# EAGLE board bontor_mbed_lowpan_rev_c (EAGLE 6.3), part 1 of 2
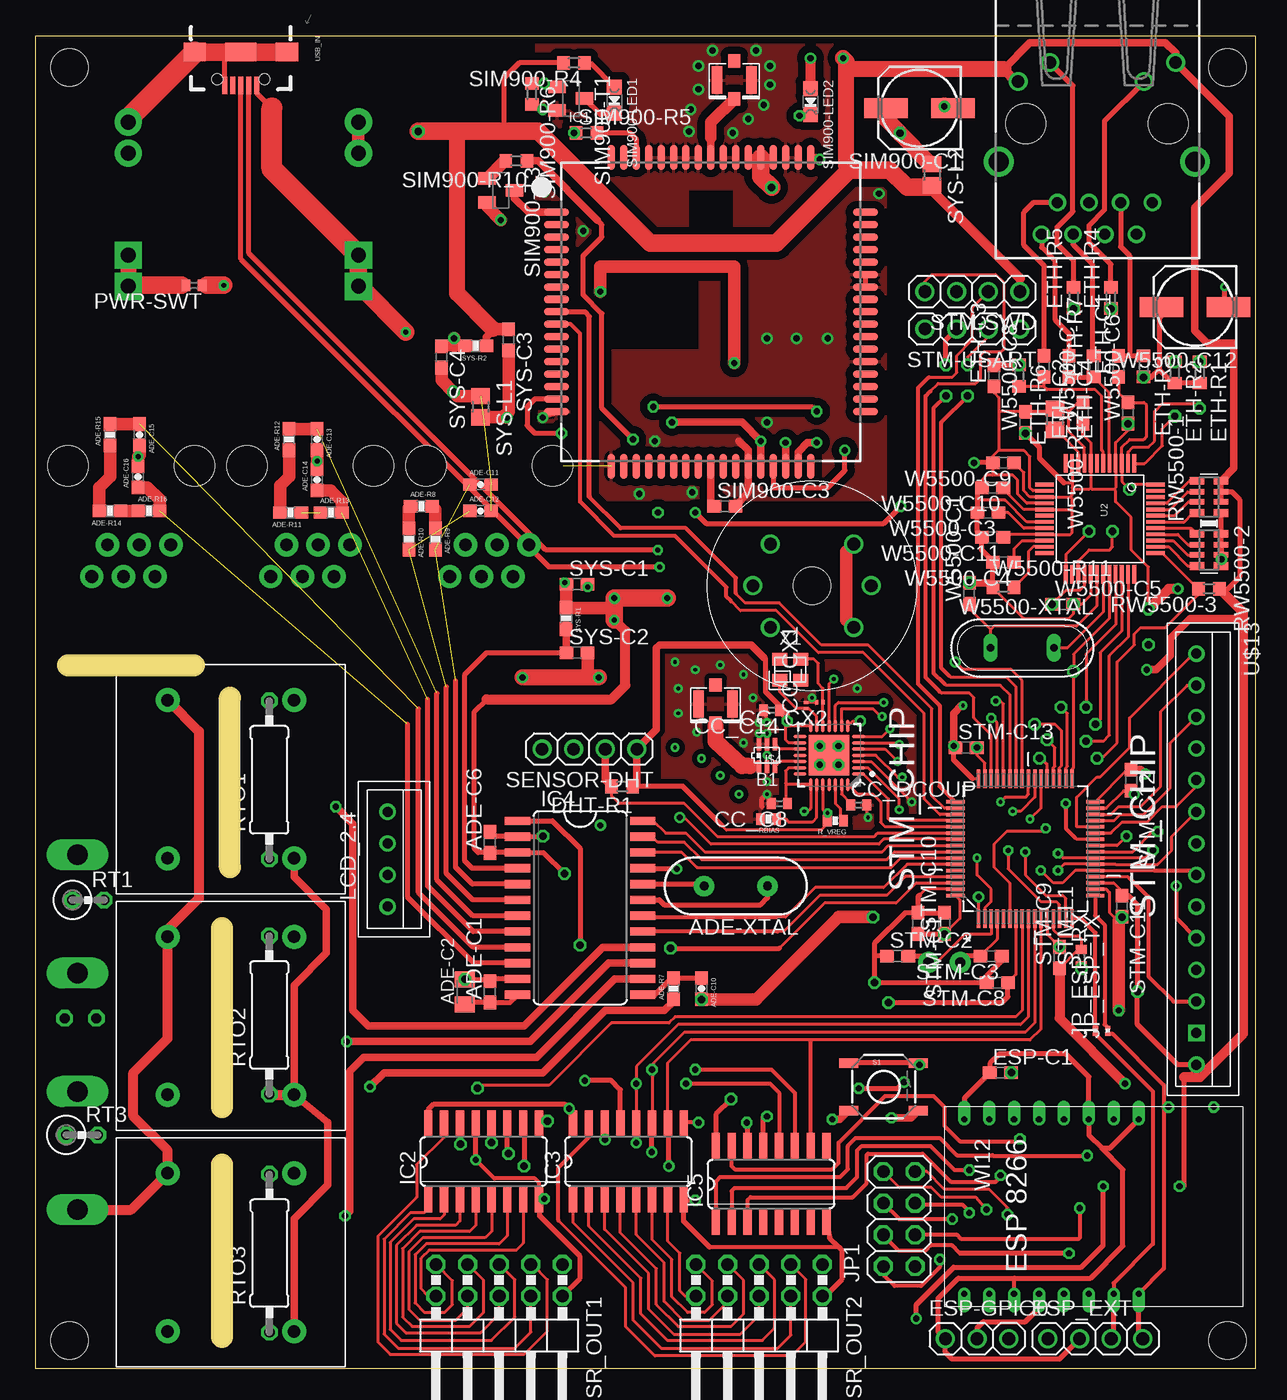
[diagram p0: board, top side]
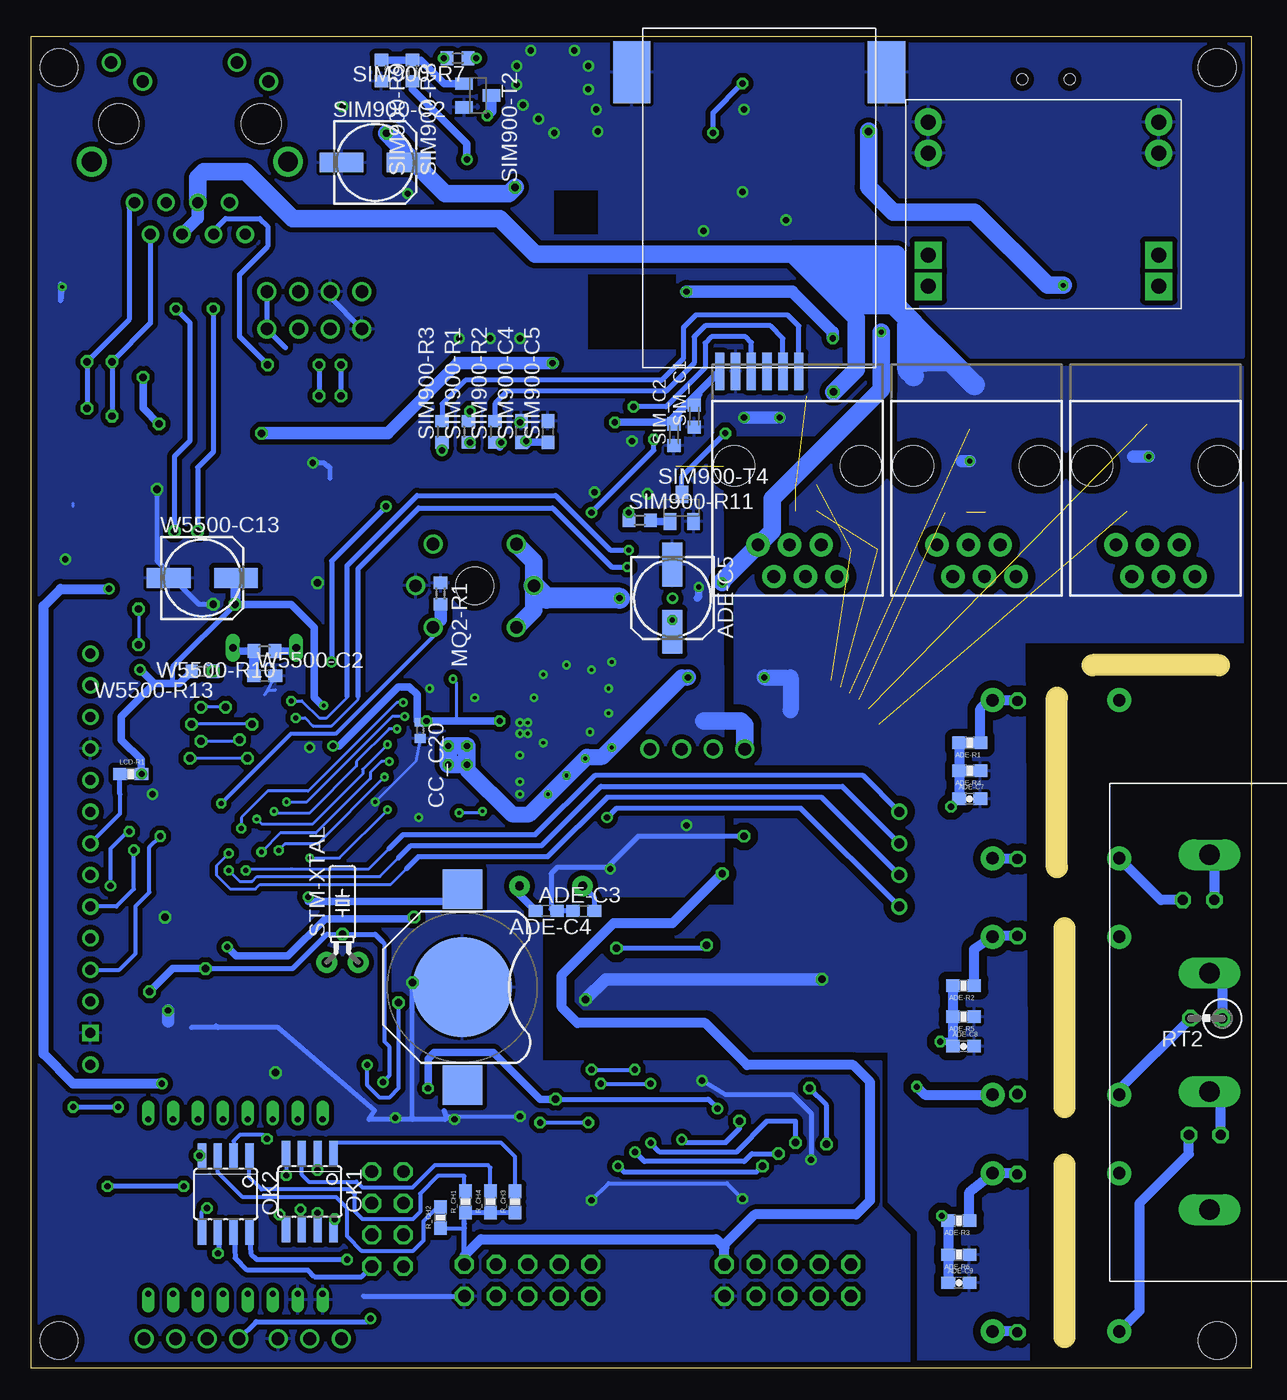
[diagram p1: board, bottom side, seen from below]

Size 98 x 107 mm. Coordinates in mm from the lower left corner, seen from the top.
Outline: 2.62,56.5 12.75,56.5
Outline: 15.62,40.25 15.62,53.88
Outline: 15,21 15,35.38
Outline: 15,2.5 15,16.38
Outline: 98,0 98,107 0,107 0,0 98,0
Copper layers (1*16): Top 0.035mm / dielectric 1.5mm / Bottom 0.035mm
Design rules "default *": minimum track width 10mil, minimum drill 10mil, track to track 0.125mm, track to pad 0.125mm, pad to pad 0.125mm, via to via 0.125mm, smd to smd 0mil, copper to edge 0.5mm, drill to drill 0.2mm, minimum pad ring 10mil, minimum via ring 8mil, stop-mask expansion 4mil, vias tented up to drill 0mil, thermal gap 10mil
Net classes: 1 power: width 0.305 mm, drill 0.6 mm, clearance 0.254 mm; 2 gnd: width 0.254 mm, drill 0.6 mm, clearance 0.254 mm
Holes 3 mm at 2.75,2.25 95.75,2.25 2.75,104.5 95.75,104.5

## Footprints (pad centres in the part's own frame; a part is rotated, then mirrored left to right if it is on the bottom)
C0603 = smd 1.1 x 1: 1 -0.85,0; 2 0.85,0
C0805K = smd 1.3 x 1.6: 1 -1,0; 2 1,0
153CLV-0605 = smd 3.5 x 1.6: + 2.7,0; - -2.7,0
0603-CAP = smd 1.1 x 1: 1 -0.85,0; 2 0.85,0
0603-RES = smd 1.1 x 1: 1 -0.85,0; 2 0.85,0
HC49US = drill 0.7 pad 1.651: 1 -2.54,0; 2 2.54,0
2450BM = smd 0.35 x 1: 1 0.65,0.9; 2 0,0.9; 3 -0.65,0.9; 4 -0.65,-0.9; 5 0,-0.9; 6 0.65,-0.9
BATTCON_12MM = smd 8 x 8: GND 0,0 | smd 3.175 x 3.175: PWR@1 -7.874,0; PWR@2 7.874,0
C0402 = smd 0.7 x 0.9: 1 -0.65,0; 2 0.65,0
C0201 = smd 0.25 x 0.35: 1 -0.25,0; 2 0.25,0
DCDCMODULE-SMALL = drill 1.2 pad 2.184: INM#1 1.8,15; INM#2 1.8,12.5; OUTM#1 20.3,15; OUTM#2 20.3,12.5 | drill 1.2 pad 2.184 square: INP#1 1.8,4.3; INP#2 1.8,1.8; OUTP#1 20.3,4.3; OUTP#2 20.3,1.8
R0603 = smd 1 x 1.1: 1 -0.85,0; 2 0.85,0
1X03 = drill 1.016: 1 -2.54,0; 2 0,0; 3 2.54,0
PINHD4 = drill 1.016: 1 -3.81,0; 2 -1.27,0; 3 1.27,0; 4 3.81,0
RJ45_PULSEJACK = drill 0.9: 1 4.445,-6.35; 2 3.175,-8.89; 3 1.905,-6.35; 4 0.635,-8.89; 5 -0.635,-6.35; 6 -1.905,-8.89; 7 -3.175,-6.35; 8 -4.445,-8.89 | drill 1: 9 6.325,4.9; 10 3.785,3.38; 11 -3.785,4.9; 12 -6.325,3.38 | drill 1.6: P$5 -7.875,-3.05; P$6 7.875,-3.05 | hole 3.2: -5.715,0; 5.715,0
SIM900_SMT = smd 2 x 0.6: P$1 -12.4,8; P$2 -12.4,7; P$3 -12.4,6; P$4 -12.4,5; P$5 -12.4,4; P$6 -12.4,3; P$7 -12.4,2; P$8 -12.4,1; P$9 -12.4,0; P$10 -12.4,-1; P$11 -12.4,-2; P$12 -12.4,-3; P$13 -12.4,-4; P$14 -12.4,-5; P$15 -12.4,-6; P$16 -12.4,-7; P$17 -12.4,-8; P$35 12.4,-8; P$36 12.4,-7; P$37 12.4,-6; P$38 12.4,-5; P$39 12.4,-4; P$40 12.4,-3; P$41 12.4,-2; P$42 12.4,-1; P$43 12.4,0; P$44 12.4,1; P$45 12.4,2; P$46 12.4,3; P$47 12.4,4; P$48 12.4,5; P$49 12.4,6; P$50 12.4,7; P$51 12.4,8 | smd 0.6 x 2: P$18 -8,-12.4; P$19 -7,-12.4; P$20 -6,-12.4; P$21 -5,-12.4; P$22 -4,-12.4; P$23 -3,-12.4; P$24 -2,-12.4; P$25 -1,-12.4; P$26 0,-12.4; P$27 1,-12.4; P$28 2,-12.4; P$29 3,-12.4; P$30 4,-12.4; P$31 5,-12.4; P$32 6,-12.4; P$33 7,-12.4; P$34 8,-12.4; P$52 8,12.4; P$53 7,12.4; P$54 6,12.4; P$55 5,12.4; P$56 4,12.4; P$57 3,12.4; P$58 2,12.4; P$59 1,12.4; P$60 0,12.4; P$61 -1,12.4; P$62 -2,12.4; P$63 -3,12.4; P$64 -4,12.4; P$65 -5,12.4; P$66 -6,12.4; P$67 -7,12.4; P$68 -8,12.4
SO16 = smd 0.66 x 2.032: 1 -4.445,-3.073; 2 -3.175,-3.073; 3 -1.905,-3.073; 4 -0.635,-3.073; 5 0.635,-3.073; 6 1.905,-3.073; 7 3.175,-3.073; 8 4.445,-3.073; 9 4.445,3.073; 10 3.175,3.073; 11 1.905,3.073; 12 0.635,3.073; 13 -0.635,3.073; 14 -1.905,3.073; 15 -3.175,3.073; 16 -4.445,3.073
SOIC24 = smd 0.66 x 2.032: 1 -6.985,-5.029; 2 -5.715,-5.029; 3 -4.445,-5.029; 4 -3.175,-5.029; 5 -1.905,-5.029; 6 -0.635,-5.029; 7 0.635,-5.029; 8 1.905,-5.029; 9 3.175,-5.029; 10 4.445,-5.029; 11 5.715,-5.029; 12 6.985,-5.029; 13 6.985,5.029; 14 5.715,5.029; 15 4.445,5.029; 16 3.175,5.029; 17 1.905,5.029; 18 0.635,5.029; 19 -0.635,5.029; 20 -1.905,5.029; 21 -3.175,5.029; 22 -4.445,5.029; 23 -5.715,5.029; 24 -6.985,5.029
U.FL = smd 2.2 x 0.85: P$1 0,1.375; P$2 0,-1.375 | smd 1.05 x 1: P$3 1.525,0; P$4 -1.525,0
RJ11-6 = drill 1.016 pad 1.88: 1 1.905,8.89; 2 3.175,6.35; 3 4.445,8.89; 4 5.715,6.35; 5 6.985,8.89; 6 8.255,6.35 | hole 3.251: 0,0; 10.16,0
2X04 = drill 1.016 octagon: 1 -3.81,-1.27; 2 -3.81,1.27; 3 -1.27,-1.27; 4 -1.27,1.27; 5 1.27,-1.27; 6 1.27,1.27; 7 3.81,-1.27; 8 3.81,1.27
R0201 = smd 0.28 x 0.43: 1 -0.255,0; 2 0.255,0
SOIC08 = smd 0.66 x 2.032: 1 -1.905,-3.073; 2 -0.635,-3.073; 3 0.635,-3.073; 4 1.905,-3.073; 5 1.905,3.073; 6 0.635,3.073; 7 -0.635,3.073; 8 -1.905,3.073
R0402 = smd 0.7 x 0.9: 1 -0.65,0; 2 0.65,0
0402-RES = smd 0.7 x 0.9: 1 -0.65,0; 2 0.65,0
0309V = drill 0.813 octagon: 1 -1.27,0; 2 1.27,0
0309/12 = drill 0.813 octagon: 1 -6.35,0; 2 6.35,0
RN8P-4R-CRA06S = smd 0.63 x 1.15: 1 -1.295,-0.975; 4 1.295,-0.975; 5 1.295,0.975; 8 -1.295,0.975 | smd 0.44 x 1.15: 2 -0.4,-0.975; 3 0.4,-0.975; 6 0.4,0.975; 7 -0.4,0.975
TACTILE-SWITCH-SMD = smd 1.524 x 0.762: 1 -2.794,1.905; 2 2.794,1.905; 3 -2.794,-1.905; 4 2.794,-1.905
MQ-3 = drill 1.016: A1 -3.35,3.35; A2 -3.35,-3.35; B1 3.35,3.35; B2 3.35,-3.35; HA -4.75,0; HB 4.75,0 | hole 3: 0,0
CHIPLED_0805_NOOUTLINE = smd 1.2 x 1.2: A 0,-1.05; C 0,1.05
SOT23-BEC = smd 1 x 1.4: B -0.95,-1.1; C 0,1.1; E 0.95,-1.1
C0603K = smd 1.05 x 1.08: 1 -0.875,0; 2 0.875,0
2X05/90 = drill 1.016 octagon: 1 -5.08,-6.35; 2 -5.08,-3.81; 3 -2.54,-6.35; 4 -2.54,-3.81; 5 0,-6.35; 6 0,-3.81; 7 2.54,-6.35; 8 2.54,-3.81; 9 5.08,-6.35; 10 5.08,-3.81
0402 = smd 0.7 x 0.9: 1 -0.65,0; 2 0.65,0
TC26H = drill 0.813 pad 1.676: 1 -1.27,0; 2 1.27,0
QFP50P1200X1200X160-64N = smd 1.473 x 0.279: 1 -5.613,3.759; 2 -5.613,3.251; 3 -5.613,2.743; 4 -5.613,2.261; 5 -5.613,1.753; 6 -5.613,1.245; 7 -5.613,0.762; 8 -5.613,0.254; 9 -5.613,-0.254; 10 -5.613,-0.762; 11 -5.613,-1.245; 12 -5.613,-1.753; 13 -5.613,-2.261; 14 -5.613,-2.743; 15 -5.613,-3.251; 16 -5.613,-3.759; 33 5.613,-3.759; 34 5.613,-3.251; 35 5.613,-2.743; 36 5.613,-2.261; 37 5.613,-1.753; 38 5.613,-1.245; 39 5.613,-0.762; 40 5.613,-0.254; 41 5.613,0.254; 42 5.613,0.762; 43 5.613,1.245; 44 5.613,1.753; 45 5.613,2.261; 46 5.613,2.743; 47 5.613,3.251; 48 5.613,3.759 | smd 0.279 x 1.473: 17 -3.759,-5.613; 18 -3.251,-5.613; 19 -2.743,-5.613; 20 -2.261,-5.613; 21 -1.753,-5.613; 22 -1.245,-5.613; 23 -0.762,-5.613; 24 -0.254,-5.613; 25 0.254,-5.613; 26 0.762,-5.613; 27 1.245,-5.613; 28 1.753,-5.613; 29 2.261,-5.613; 30 2.743,-5.613; 31 3.251,-5.613; 32 3.759,-5.613; 49 3.759,5.613; 50 3.251,5.613; 51 2.743,5.613; 52 2.261,5.613; 53 1.753,5.613; 54 1.245,5.613; 55 0.762,5.613; 56 0.254,5.613; 57 -0.254,5.613; 58 -0.762,5.613; 59 -1.245,5.613; 60 -1.753,5.613; 61 -2.261,5.613; 62 -2.743,5.613; 63 -3.251,5.613; 64 -3.759,5.613
FB805 = smd 1.3 x 1.5: 1 -0.85,0; 2 0.85,0
W5500 = smd 1.5 x 0.3: 1 -4.45,2.75; 2 -4.45,2.25; 3 -4.45,1.75; 4 -4.45,1.25; 5 -4.45,0.75; 6 -4.45,0.25; 7 -4.45,-0.25; 8 -4.45,-0.75; 9 -4.45,-1.25; 10 -4.45,-1.75; 11 -4.45,-2.25; 12 -4.45,-2.75; 25 4.45,-2.75; 26 4.45,-2.25; 27 4.45,-1.75; 28 4.45,-1.25; 29 4.45,-0.75; 30 4.45,-0.25; 31 4.45,0.25; 32 4.45,0.75; 33 4.45,1.25; 34 4.45,1.75; 35 4.45,2.25; 36 4.45,2.75 | smd 0.3 x 1.5: 13 -2.75,-4.45; 14 -2.25,-4.45; 15 -1.75,-4.45; 16 -1.25,-4.45; 17 -0.75,-4.45; 18 -0.25,-4.45; 19 0.25,-4.45; 20 0.75,-4.45; 21 1.25,-4.45; 22 1.75,-4.45; 23 2.25,-4.45; 24 2.75,-4.45; 37 2.75,4.45; 38 2.25,4.45; 39 1.75,4.45; 40 1.25,4.45; 41 0.75,4.45; 42 0.25,4.45; 43 -0.25,4.45; 44 -0.75,4.45; 45 -1.25,4.45; 46 -1.75,4.45; 47 -2.25,4.45; 48 -2.75,4.45
QFN50P500X500X100-29N = smd 1.05 x 0.3: 1 -2.35,1.5; 2 -2.35,1; 3 -2.35,0.5; 4 -2.35,0; 5 -2.35,-0.5; 6 -2.35,-1; 7 -2.35,-1.5; 15 2.35,-1.5; 16 2.35,-1; 17 2.35,-0.5; 18 2.35,0; 19 2.35,0.5; 20 2.35,1; 21 2.35,1.5 | smd 0.3 x 1.05: 8 -1.5,-2.35; 9 -1,-2.35; 10 -0.5,-2.35; 11 0,-2.35; 12 0.5,-2.35; 13 1,-2.35; 14 1.5,-2.35; 22 1.5,2.35; 23 1,2.35; 24 0.5,2.35; 25 0,2.35; 26 -0.5,2.35; 27 -1,2.35; 28 -1.5,2.35 | smd 3.25 x 3.25: 29 0,0
WI12 = drill 0.5 pad 0.813 offset: ADC 10.4,1; CH_PD 12.4,1; GND 22.4,15; GPIO00 16.4,15; GPIO02 18.4,15; GPIO04 12.4,15; GPIO05 14.4,15; GPIO12 18.4,1; GPIO13 20.4,1; GPIO14 16.4,1; GPIO15 20.4,15; GPIO16 14.4,1; REST 8.4,1; RXD 10.4,15; TXD 8.4,15; VCC 22.4,1
SIMHOLDER-PUSHPUSH = smd 3 x 5: SHIELD_GND$1 -0.89,23.75; SHIELD_GND$2 19.56,23.75 | smd 0.75 x 3: SIM_CLK 11.25,-0.28; SIM_GND 7.44,-0.28; SIM_IO 12.52,-0.28; SIM_RST 8.71,-0.28; SIM_VDD 6.17,-0.28; VPP 9.98,-0.28
TV16 = drill 1 pad 1.93: IA 4.12,2.85; IB 4.12,15.55; OA 14.28,15.55; OB 14.28,2.85
TERMINAL-TWO-WAY = drill 1.65 long: PIN$1 0,14.25; PIN$2 0,4.75; PIN$3 0,-4.75; PIN$4 0,-14.25
LCD_TOUCH_2-4 = drill 0.8: LCD_CS 11.4,64.99; LCD_D/C 6.32,64.99; LCD_MISO -3.84,64.99; LCD_MOSI 3.78,64.99; LCD_RESET 8.86,64.99; LCD_SCK 1.24,64.99; LCD_VCC 16.48,64.99; LED -1.3,64.99; SD_CS 3.78,0.035; SD_MISO -1.3,0.035; SD_MOSI 1.24,0.035; SD_SCK -3.84,0.035; T_CLK -6.38,64.99; T_CS -8.92,64.99; T_DIN -11.46,64.99; T_DO -14,64.99; T_IRQ -16.54,64.99 | drill 0.8 square: LCD_GND 13.94,64.99
USB-B-MICRO-SMD_V03 = smd 1.4 x 0.4: D+1 2.7,0; D-1 2.7,0.65; GND1 2.7,-1.3; ID1 2.7,-0.65; VBUS1 2.7,1.3 | smd 1.5 x 1.8: SHIELD1 0,3.7; SHIELD2 0,-3.7 | smd 1.5 x 2.5: SHIELD3 0,0 | hole 0.85: 2.2,1.9; 2.2,-1.9
R0805 = smd 1.3 x 1.5: 1 -0.85,0; 2 0.85,0
QS = drill 0.61 long: 1 -2.54,0; 2 2.54,0
NX2520SA = smd 1.2 x 1: 1 -0.85,-0.85; 2 0.85,-0.85; 3 0.85,0.85; 4 -0.85,0.85

## Placement (x,y rotation side)
ADE-C1  0.1uF  [C0603]  36.5,30.25 90 top
ADE-C2  10uF  [C0805K]  34.5,30.25 90 top
ADE-C3  22pF  [C0603]  56.62,36.75 0 bottom
ADE-C4  22pF  [C0603]  53.62,36.75 180 bottom
ADE-C5  10uF  [153CLV-0605]  46.5,61.88 270 bottom
ADE-C6  100nF  [C0603]  36.5,42.25 90 top
ADE-C7  33nF  [0603-CAP]  22.62,45.75 0 bottom
ADE-C8  33nF  [0603-CAP]  23.12,25.88 0 bottom
ADE-C9  33nF  [0603-CAP]  23.5,6.88 0 bottom
ADE-C10  33nF  [0603-CAP]  53.5,30.5 270 top
ADE-C11  33nF  [0603-CAP]  35.75,71 0 top
ADE-C12  33nF  [0603-CAP]  35.75,68.88 0 top
ADE-C13  33nF  [0603-CAP]  22.62,74.62 270 top
ADE-C14  33nF  [0603-CAP]  22.62,71.38 90 top
ADE-C15  33nF  [0603-CAP]  8.38,75 270 top
ADE-C16  33nF  [0603-CAP]  8.25,71.62 90 top
ADE-R1  81K  [0603-RES]  22.62,50.25 180 bottom
ADE-R2  81K  [0603-RES]  23.12,30.75 180 bottom
ADE-R3  81K  [0603-RES]  23.5,11.88 180 bottom
ADE-R4  1K  [0603-RES]  22.62,48 180 bottom
ADE-R5  1K  [0603-RES]  23.12,28.25 180 bottom
ADE-R6  1K  [0603-RES]  23.5,9.12 180 bottom
ADE-R7  1K  [0603-RES]  51.25,30.5 90 top
ADE-R8  33R  [0603-RES]  31,69.25 0 top
ADE-R9  1K  [0603-RES]  32.12,66.62 270 top
ADE-R10  1K  [0603-RES]  30,66.62 270 top
ADE-R11  33R  [0603-RES]  20.5,68.75 180 top
ADE-R12  1K  [0603-RES]  20.38,74.62 90 top
ADE-R13  1K  [0603-RES]  23.75,68.75 0 top
ADE-R14  33R  [0603-RES]  6,68.88 180 top
ADE-R15  1K  [0603-RES]  6,75 90 top
ADE-R16  1K  [0603-RES]  9.12,68.88 0 top
ADE-XTAL  10MHz  [HC49US]  56.25,38.75 180 top
B1  2450BM15A0002  [2450BM]  58.75,49.25 180 top
BAT1  [BATTCON_12MM]  63.38,30.62 270 bottom
CC_C8  100nF  [C0402]  59.75,45.38 180 top
CC_C14  100nF  [C0402]  59.12,52.88 180 top
CC_C20  100nF  [C0402]  66.75,51.25 270 bottom
CC_CX1  27p  [C0201]  61.88,53.25 90 top
CC_CX2  27p  [C0201]  63,53.5 180 top
CC_DCOUP  100nF  [C0402]  66.12,45.25 0 top
DCDC-3.5V  DCDCMODULE_SMALL  [DCDCMODULE-SMALL]  27.75,85.12 0 bottom
DHT-R1  10k  [R0603]  47.12,46.75 180 top
ESP-C1  100nF  [C0603]  77.5,23.75 0 top
ESP-GPIO0  [1X03]  75.62,2.38 0 top
ESP_EXT  PINHD4  [PINHD4]  85.12,2.38 0 top
ETH-C1  22nF  [C0603]  87,80.5 90 top
ETH-C2  6.8nF  [C0603]  81,80.5 270 top
ETH-C3  10nF  [C0603]  77,79.75 90 top
ETH-C4  6.8nF  [C0603]  83,80.5 270 top
ETH-R1  49R9  [R0603]  93.5,80 270 top
ETH-R2  49R9  [R0603]  91.5,80 270 top
ETH-R3  10R  [R0603]  89,80.5 270 top
ETH-R4  330  [R0603]  86.38,86 90 top
ETH-R5  330  [R0603]  83.38,86 90 top
ETH-R6  49R9  [R0603]  79,79.75 270 top
ETH-R7  49R9  [R0603]  85,80.5 90 top
ETHERNET  [RJ45_PULSEJACK]  85.25,100 0 top
IC1  SIM900  [SIM900_SMT]  54.25,84.88 0 top
IC2  74HC595D  [SO16]  36,16.62 0 top
IC3  74HC595D  [SO16]  47.62,16.62 0 top
IC4  ADE7758RW  [SOIC24]  43.75,37 270 top
IC5  74HC595D  [SO16]  59.09,14.81 0 top
J1  U.FL  [U.FL]  54.62,53.38 270 top
J2  RJ11-6PTH  [RJ11-6]  31.38,72.5 180 bottom
J3  RJ11-6PTH  [RJ11-6]  17,72.5 180 bottom
J4  RJ11-6PTH  [RJ11-6]  2.62,72.5 180 bottom
JP1  [2X04]  69.38,12 90 top
JP_ESP_RX  0  [R0201]  85.12,27.12 90 top
JP_ESP_TX  0  [R0201]  86.12,27.12 90 top
LCD-R1  680R  [0603-RES]  90,47.75 0 bottom
MQ2-R1  10k  [R0603]  65.12,62.25 270 bottom
OK1  ILD205  [SOIC08]  75.62,14.2 180 bottom
OK2  ILD205  [SOIC08]  82.38,14 180 bottom
PWR-SWT  [R0402]  12.75,87 180 top
R_CH1  270  [0603-RES]  63.12,13.38 90 bottom
R_CH2  270  [0603-RES]  65.14,12.11 90 bottom
R_CH3  270  [0603-RES]  59.12,13.38 90 bottom
R_CH4  270  [0603-RES]  61.12,13.38 90 bottom
R_VREG  10K  [0402-RES]  64.25,44 180 top
RBIAS  56k  [0402-RES]  58.88,44.12 180 top
RT1  [0309V]  4.25,37.62 0 top
RT2  [0309V]  3.62,28.12 180 bottom
RT3  [0309V]  3.75,18.75 0 top
RTO1  [0309/12]  18.79,47.27 90 top
RTO2  [0309/12]  18.79,28.39 90 top
RTO3  [0309/12]  18.8,9.25 90 top
RW5500-1  10k  [RN8P-4R-CRA06S]  94.25,70 90 top
RW5500-2  10k  [RN8P-4R-CRA06S]  94.25,65.75 270 top
RW5500-3  10k  [R0603]  94.25,62.62 180 top
S1  [TACTILE-SWITCH-SMD]  68.12,22.62 0 top
SENSOR-DHT  PINHD4  [PINHD4]  44.5,49.75 180 top
SENSOR-MQ2  METHANE_SENSOR  [MQ-3]  62.38,62.88 0 top
SIM900-C1  100uF  [153CLV-0605]  71,101.25 180 top
SIM900-C2  100uF  [153CLV-0605]  70.38,96.88 0 bottom
SIM900-C3  4u7  [C0603]  55.38,69.25 0 top
SIM900-C4  100nF  [C0603]  58.62,75.25 90 bottom
SIM900-C5  22pF  [C0603]  56.5,75.25 90 bottom
SIM900-LED1  [CHIPLED_0805_NOOUTLINE]  46.5,101.88 180 top
SIM900-LED2  [CHIPLED_0805_NOOUTLINE]  62.25,101.75 180 top
SIM900-R1  22R  [R0603]  62.88,75.25 90 bottom
SIM900-R2  22R  [R0603]  60.75,75.25 90 bottom
SIM900-R3  22R  [R0603]  65,75.25 90 bottom
SIM900-R4  680R  [R0603]  43.25,104.88 180 top
SIM900-R5  1K  [R0603]  44.25,99.25 0 top
SIM900-R6  10K  [R0603]  39.88,102.38 270 top
SIM900-R7  680R  [R0603]  63.75,105.25 180 bottom
SIM900-R8  1K  [R0603]  67.38,104.25 270 bottom
SIM900-R9  10K  [R0603]  69.88,104.25 270 bottom
SIM900-R10  120R  [R0603]  38.62,97 180 top
SIM900-R11  120R  [R0603]  49.12,68.12 0 bottom
SIM900-T1  [SOT23-BEC]  43,102 270 top
SIM900-T2  [SOT23-BEC]  62.12,102.25 270 bottom
SIM900-T3  [SOT23-BEC]  37.38,94.62 270 top
SIM900-T4  [SOT23-BEC]  45.75,69.12 0 bottom
SIM_C1  100nF  [C0603K]  44.75,76.5 90 bottom
SIM_C2  22pF  [C0603K]  46.38,75 90 bottom
SR_OUT1  [2X05/90]  37.25,2 180 top
SR_OUT2  [2X05/90]  58.12,2 180 top
STM-C1  1uF  [C0603]  70.88,35.75 270 top
STM-C2  4.3pF  [C0603]  69.25,33.12 0 top
STM-C3  4.3pF  [C0603]  76.75,33.12 180 top
STM-C8  100nF  [C0603]  77.25,31 180 top
STM-C9  100nF  [C0603]  82.25,33 90 top
STM-C10  100nF  [C0603]  73,35.75 90 top
STM-C11  100nF  [C0603]  87.25,37.12 270 top
STM-C12  100nF  [C0603]  88,47.25 270 top
STM-C13  100nF  [C0603]  74.75,49.88 0 top
STM-L1  BLM15HB121SN1  [0402]  84,33 90 top
STM-SWD  PINHD4  [PINHD4]  75.25,86.5 180 top
STM-USART  PINHD4  [PINHD4]  75.25,83.5 180 top
STM-XTAL  32.768kHz  [TC26H]  73,32.62 0 bottom
STM_CHIP  STM32F103RBT6  [QFP50P1200X1200X160-64N]  79.5,41.75 90 top
SYS-C1  0.1uF  [C0603]  43.5,63 0 top
SYS-C2  0.1uF  [C0603]  43.5,57.5 0 top
SYS-C3  0.1uF  [C0603]  38,82.62 270 top
SYS-C4  0.1uF  [C0603]  32.62,81.25 270 top
SYS-L1  150Mhz  [FB805]  35.75,77.25 270 top
SYS-L2  150Mhz  [FB805]  72,95.88 270 top
SYS-R1  10R  [0603-RES]  42.62,60.25 270 top
SYS-R2  10R  [0603-RES]  35.38,82.12 180 top
U2  W5500  [W5500]  85.5,68.25 270 top
U$4  CC2520  [QFN50P500X500X100-29N]  63.75,49.25 180 top
U$5  ESP8266WI12  [WI12]  97,21 180 top
U$7  U.FL  [U.FL]  56.12,103.5 270 top
U$8  SIM_HOLDER  [SIMHOLDER-PUSHPUSH]  48.88,80.38 0 bottom
U$9  TRANSFORMER  [TV16]  6.5,38.12 0 top
U$10  TRANSFORMER  [TV16]  6.5,19.12 0 top
U$11  TRANSFORMER  [TV16]  6.5,0.12 0 top
U$12  TERMINAL_BLOCK_TW  [TERMINAL-TWO-WAY]  3.38,27 0 bottom
U$13  LCD_2.4  [LCD_TOUCH_2-4]  28.25,40.88 270 top
USB_IN  USB_MICROB  [USB-B-MICRO-SMD_V03]  16.5,105.75 270 top
W5500-C1  18pF  [C0603]  75,62.25 90 top
W5500-C2  18pF  [C0603]  79.25,55.62 0 bottom
W5500-C3  4.7uF  [C0603]  76.5,68.75 180 top
W5500-C4  10nF  [C0603]  77.75,64.75 180 top
W5500-C5  100nF  [C0603]  82.5,61.38 0 top
W5500-C6  100nF  [C0603]  87.75,76.75 90 top
W5500-C7  100nF  [C0603]  84.12,76.75 90 top
W5500-C8  100nF  [C0603]  79.5,76 90 top
W5500-C9  100nF  [C0603]  77.75,72.75 180 top
W5500-C10  100nF  [C0603]  76.88,70.75 180 top
W5500-C11  100nF  [C0603]  76.88,66.75 180 top
W5500-C12  10uF/16V  [153CLV-0605]  93.12,85.25 180 top
W5500-C13  10uF/16V  [153CLV-0605]  84.25,63.5 0 bottom
W5500-R10  1M  [R0603]  79.25,57.62 180 bottom
W5500-R11  10k  [R0603]  77.75,62.75 0 top
W5500-R12  12K4  [R0805]  81.88,76.25 270 top
W5500-R13  10k  [R0603]  84.25,56 180 bottom
W5500-XTAL  25MHz  [QS]  79.25,57.88 0 top
X1  NX2520SA  [NX2520SA]  60.62,56.12 0 top

## Library data of the parts
ADE-C1-ADE-C6 CC_C8 CC_C14 CC_C20 CC_CX1 CC_CX2 CC_DCOUP ESP-C1 ETH-C1-ETH-C4 JP_ESP_RX JP_ESP_TX PWR-SWT RT1-RT3 RTO1-RTO3 RW5500-3 SIM900-C1-SIM900-C5 SIM900-R1-SIM900-R9 SIM_C1 SIM_C2 STM-C1-STM-C3 STM-C8-STM-C13 SYS-C1-SYS-C4 W5500-C1-W5500-C13 = rcl
ADE-C7-ADE-C16 ADE-R1-ADE-R16 LCD-R1 R_CH1-R_CH4 R_VREG RBIAS SYS-R1 SYS-R2 = SparkFun-Passives
ADE-XTAL STM-XTAL = SparkFun-FreqCtrl
B1 = rpi-cc2520; DIGIKEY: 712-1536-1-ND
BAT1 = SparkFun-Electromechanical; PROD_ID: BATT-08044
DCDC-3.5V U$8-U$13 = bontor
DHT-R1 ETH-R1-ETH-R7 MQ2-R1 SIM900-R10 SIM900-R11 W5500-R10-W5500-R13 = resistor
ESP-GPIO0 = adafruit
ESP_EXT SENSOR-DHT STM-SWD STM-USART = TFT_LCD_2.2
ETHERNET IC1 SIM900-LED1 SIM900-LED2 = microbuilder
IC2 IC3 IC5 = 74xx-eu
IC4 = ade7758
J1 = SparkFun-Connectors; PROD_ID: CONN-09193
J2-J4 U$7 = SparkFun
JP1 SR_OUT1 SR_OUT2 = pinhead
OK1 OK2 = optocoupler; MF: VISHAY/TELEFUNKEN; MPN: ILD205T; OC_FARNELL: 1469512; OC_NEWARK: 20H8678
RW5500-1 RW5500-2 SYS-L1 SYS-L2 = dp_devices
S1 = SparkFun-Electromechanical
SENSOR-MQ2 = SparkFun-Sensors
SIM900-T1 SIM900-T2 = transistor
SIM900-T3 SIM900-T4 = transistor-neu-to92
STM-L1 = inductors
STM_CHIP = ST Microelctronics_By_element14_Batch_1; MPN: STM32L152RBT6; OC_FARNELL: 2060946; OC_NEWARK: 65T3806; PACKAGE: QTP-64; SUPPLIER: STMICROELECTRONICS
U2 = W5500
U$4 = chipcon-ti-v2
U$5 = esp8266
USB_IN = SparkFun-Connectors; PROD_ID: CONN-11752
W5500-XTAL = special
X1 = bbb-cc2520; DIGIKEY: 644-1065-1-ND

## Nets
+5V [power]: ADE-C5.+ ADE-C6.1 DCDC-3.5V.INP#1 DCDC-3.5V.INP#2 IC4.3 R_CH1.1 R_CH2.1 R_CH3.1 R_CH4.1 SENSOR-MQ2.A1 SENSOR-MQ2.A2 SENSOR-MQ2.HA SR_OUT1.1 SR_OUT2.1 SYS-C1.1 SYS-R1.1 USB_IN.VBUS1
ACTLED: ETH-R4.1 U2.27
ADE_APCF: IC4.1 STM_CHIP.62
ADE_IRQ: IC4.18 STM_CHIP.59
ADE_MISO: IC4.24 STM_CHIP.56
ADE_MOSI: IC4.22 STM_CHIP.58
ADE_SCK: IC4.23 STM_CHIP.57
ADE_VARCF: IC4.17 STM_CHIP.61
AGND: ADE-C1.2 ADE-C2.2 ADE-C7.2 ADE-C8.2 ADE-C9.2 ADE-C10.2 ADE-C11.2 ADE-C12.2 ADE-C13.2 ADE-C14.2 ADE-C15.2 ADE-C16.2 ADE-R4.1 ADE-R5.1 ADE-R6.1 ETHERNET.4 ETHERNET.5 IC4.11 STM-C9.2 STM_CHIP.12 SYS-C2.2 SYS-C4.2 SYS-L1.1 U$4.29
AVDD: IC4.4 SYS-C2.1 SYS-R1.2
CC_GPIO0: STM_CHIP.6 U$4.10
CC_GPIO1: STM_CHIP.40 U$4.9
CC_GPIO2: STM_CHIP.39 U$4.7
CC_GPIO3: STM_CHIP.38 U$4.6
CC_GPIO4: STM_CHIP.15 U$4.5
CC_GPIO5: STM_CHIP.14 U$4.4
CC_MISO: STM_CHIP.52 U$4.1
CC_MOSI: STM_CHIP.2 U$4.2
CC_RESET: U$4.25
CC_SCK: STM_CHIP.53 U$4.28
CH1_A: JP1.2 OK2.8
CH1_B: JP1.1 OK2.7
CH1_IN: IC5.15 OK2.2
CH2_A: JP1.4 OK2.6
CH2_B: JP1.3 OK2.5
CH2_IN: IC5.1 OK2.4
CH3_A: JP1.6 OK1.8
CH3_B: JP1.5 OK1.7
CH3_IN: IC5.2 OK1.2
CH4_A: JP1.8 OK1.6
CH4_B: JP1.7 OK1.5
CH4_IN: IC5.3 OK1.4
DC_VOUT: DCDC-3.5V.OUTP#1 DCDC-3.5V.OUTP#2 PWR-SWT.2
DGND: ADE-C3.2 ADE-C4.2 ADE-C5.- ADE-C6.2 B1.2 B1.5 B1.6 BAT1.GND CC_C8.2 CC_C14.2 CC_C20.2 CC_CX1.2 CC_CX2.2 CC_DCOUP.2 DCDC-3.5V.INM#1 DCDC-3.5V.INM#2 DCDC-3.5V.OUTM#1 DCDC-3.5V.OUTM#2 ESP-C1.2 ESP-GPIO0.3 ETH-C1.1 ETH-C3.1 IC1.P$17 IC1.P$18 IC1.P$29 IC1.P$39 IC1.P$45 IC1.P$46 IC1.P$53 IC1.P$54 IC1.P$58 IC1.P$59 IC1.P$61 IC1.P$62 IC1.P$63 IC1.P$64 IC1.P$65 IC2.8 IC2.13 IC3.8 IC3.13 IC4.2 IC4.21 IC5.8 IC5.13 J1.P$1 J1.P$2 MQ2-R1.1 RBIAS.2 RW5500-1.1 RW5500-2.5 RW5500-2.6 RW5500-2.7 RW5500-2.8 S1.3 S1.4 SENSOR-DHT.4 SENSOR-MQ2.HB SIM900-C1.- SIM900-C2.- SIM900-C3.2 SIM900-C4.2 SIM900-C5.2 SIM900-R6.2 SIM900-R9.2 SIM900-T1.E SIM900-T2.E SIM900-T3.E SIM900-T4.E SIM_C1.1 SIM_C2.1 SR_OUT1.2 SR_OUT2.2 STM-C1.1 STM-C2.1 STM-C3.1 STM-C8.2 STM-C10.2 STM-C11.2 STM-C12.2 STM-C13.2 STM-SWD.3 STM-USART.4 STM_CHIP.18 STM_CHIP.31 STM_CHIP.47 STM_CHIP.63 SYS-C1.2 SYS-C3.2 SYS-L1.2 U2.3 U2.9 U2.14 U2.16 U2.19 U2.29 U2.48 U$4.3 U$5.GND U$5.GPIO15 U$7.P$1 U$7.P$2 U$8.SHIELD_GND$1 U$8.SHIELD_GND$2 U$8.SIM_GND U$13.LCD_GND U$13.T_CS USB_IN.GND1 USB_IN.SHIELD1 USB_IN.SHIELD2 USB_IN.SHIELD3 W5500-C1.2 W5500-C2.2 W5500-C3.2 W5500-C4.2 W5500-C5.2 W5500-C6.2 W5500-C7.2 W5500-C8.2 W5500-C9.2 W5500-C10.2 W5500-C11.2 W5500-C12.- W5500-C13.- W5500-R11.1 W5500-R12.1
DHT_DATA: DHT-R1.2 SENSOR-DHT.2 STM_CHIP.54
ESP_GPIO0: ESP-GPIO0.2 U$5.GPIO00
ESP_RX: ESP_EXT.3 JP_ESP_RX.1 U$5.RXD
ESP_TX: ESP_EXT.4 JP_ESP_TX.1 U$5.TXD
ETH_CS: STM_CHIP.33 U2.32 W5500-R13.1
ETH_MISO: STM_CHIP.35 U2.34
ETH_MOSI: STM_CHIP.36 U2.35
ETH_RSTN: RW5500-3.2 STM_CHIP.37 U2.37
ETH_SCK: STM_CHIP.34 U2.33
GPIO11: IC1.P$67
GPIO12: IC1.P$68
IBN: ADE-R11.1 ADE-R13.1
ICN: ADE-R14.1 ADE-R16.1
LCD_CS: STM_CHIP.20 U$13.LCD_CS
LCD_D/C: STM_CHIP.24 U$13.LCD_D/C
LCD_LED: LCD-R1.1 U$13.LED
LCD_MISO: STM_CHIP.22 U$13.LCD_MISO U$13.SD_MISO
LCD_MOSI: STM_CHIP.23 U$13.LCD_MOSI U$13.SD_MOSI
LCD_RESET: STM_CHIP.25 U$13.LCD_RESET
LCD_SCK: STM_CHIP.21 U$13.LCD_SCK U$13.SD_SCK
LINKLED: ETH-R5.1 U2.25
MQ2_DATA: MQ2-R1.2 SENSOR-MQ2.B1 SENSOR-MQ2.B2 STM_CHIP.26
N: U$9.IB U$10.IB U$11.IB U$12.PIN$4
N$1: STM-C2.2 STM-XTAL.2 STM_CHIP.3
N$2: STM-C3.2 STM-XTAL.1 STM_CHIP.4
N$3: IC1.P$31 SIM900-R3.1
N$5: OK2.1 R_CH1.2
N$6: OK2.3 R_CH2.2
N$7: OK1.1 R_CH3.2
N$8: IC1.P$32 SIM900-R2.1
N$9: R_VREG.1 U$4.26
N$10: ADE-C9.1 ADE-R3.2 ADE-R6.2 IC4.14
N$11: ETH-R4.2 ETHERNET.10
N$12: ETH-R5.2 ETHERNET.11
N$13: IC1.P$33 SIM900-R1.1
N$14: IC1.P$26 SIM900-C3.1
N$15: IC1.P$60 U$7.P$3
N$16: SIM900-LED1.A SIM900-R4.1
N$17: SIM900-LED1.C SIM900-T1.C
N$18: SIM900-R5.1 SIM900-R6.1 SIM900-T1.B
N$19: SIM900-LED2.A SIM900-R7.1
N$20: SIM900-LED2.C SIM900-T2.C
N$21: SIM900-R8.1 SIM900-R9.1 SIM900-T2.B
N$22: ETH-C2.1 ETHERNET.7
N$23: ETH-C1.2 ETH-R3.1 ETHERNET.3
N$24: ADE-C15.1 ADE-R15.2 IC4.9
N$25: ADE-R11.2 ADE-R12.1
N$26: ETH-C4.1 ETHERNET.8
N$27: ADE-C11.1 ADE-R9.2 IC4.5
N$28: ADE-C12.1 ADE-R10.2 IC4.6
N$29: ETH-C3.2 ETH-R6.1 ETH-R7.2 ETHERNET.6
N$30: ADE-C14.1 ADE-R13.2 IC4.8
N$31: ADE-C13.1 ADE-R12.2 IC4.7
N$32: ADE-C1.1 ADE-C2.1 IC4.12
N$33: ADE-C3.1 ADE-XTAL.1 IC4.19
N$34: ADE-C4.1 ADE-XTAL.2 IC4.20
N$35: ADE-C10.1 ADE-R7.2 IC4.13
N$36: ADE-R2.1 RTO2.2 U$10.OA
N$37: ADE-C8.1 ADE-R2.2 ADE-R5.2 IC4.15
N$38: U2.20 W5500-C3.1
N$39: ADE-R8.2 ADE-R9.1
N$40: ADE-C16.1 ADE-R16.2 IC4.10
N$41: U2.22 W5500-C4.1
N$42: U2.23 W5500-R11.2
N$43: CC_DCOUP.1 U$4.27
N$44: SIM900-R10.2 SIM900-T3.B
N$45: SIM900-R11.2 SIM900-T4.B
N$46: OK1.3 R_CH4.2
N$47: ADE-R8.1 ADE-R10.1
N$48: ADE-R14.2 ADE-R15.1
N$50: U2.31 W5500-C2.1 W5500-R10.2 W5500-XTAL.2
N$51: U2.10 W5500-R12.2
N$52: ADE-C7.1 ADE-R1.2 ADE-R4.2 IC4.16
N$54: ADE-R1.1 RTO1.2 U$9.OA
N$55: ADE-R7.1 RTO1.1 RTO2.1 RTO3.1 U$9.OB U$10.OB U$11.OB
N$57: RW5500-2.4 U2.38
N$58: RW5500-2.3 U2.39
N$59: RW5500-2.2 U2.40
N$60: RW5500-2.1 U2.41
N$61: RW5500-1.8 U2.42
N$62: RW5500-1.7 U2.43
N$63: RW5500-1.6 U2.44
N$64: RW5500-1.5 U2.45
N$65: ADE-R3.1 RTO3.2 U$11.OA
N$66: U2.30 W5500-C1.1 W5500-R10.1 W5500-XTAL.1
N$68: IC1.P$55 IC1.P$56 IC1.P$57 SIM900-C1.+ SIM900-C2.+ SYS-L2.1
N$69: CC_CX1.1 U$4.13 X1.1
N$70: CC_CX2.1 U$4.12 X1.3
N$71: JP_ESP_RX.2 STM_CHIP.16
N$72: JP_ESP_TX.2 STM_CHIP.17
N$73: RT3.2 U$11.IA
N$74: RT2.2 U$10.IA
N$75: RT1.2 U$9.IA
N$76: RBIAS.1 U$4.23
N$78: B1.4 U$4.17
N$82: B1.3 U$4.19
N$83: B1.1 J1.P$3
Q1: IC2.15 SR_OUT1.3
Q2: IC2.1 SR_OUT1.4
Q3: IC2.2 SR_OUT1.5
Q4: IC2.3 SR_OUT1.6
Q5: IC2.4 SR_OUT1.7
Q6: IC2.5 SR_OUT1.8
Q7: IC2.6 SR_OUT1.9
Q8: IC2.7 SR_OUT1.10
Q9: IC3.15 SR_OUT2.3
Q10: IC3.1 SR_OUT2.4
Q11: IC3.2 SR_OUT2.5
Q12: IC3.3 SR_OUT2.6
Q13: IC3.4 SR_OUT2.7
Q14: IC3.5 SR_OUT2.8
Q15: IC3.6 SR_OUT2.9
Q16: IC3.7 SR_OUT2.10
QS: IC2.9 IC3.14
QS2: IC3.9 IC5.14
R: RT1.1 U$12.PIN$1
RXN: ETH-C4.2 ETH-R7.1 U2.5
RXP: ETH-C2.2 ETH-R6.2 U2.6
S: RT2.1 U$12.PIN$2
SD_CS: STM_CHIP.55 U$13.SD_CS
SERIAL_RX: STM-USART.3 STM_CHIP.43
SERIAL_TX: STM-USART.2 STM_CHIP.42
SIM900_PWRKEY: IC1.P$1 SIM900-T3.C
SIM900_RESET: IC1.P$16 SIM900-T4.C
SIM_NETLIGHT: IC1.P$52 SIM900-R8.2
SIM_PWRKEY: SIM900-R10.1 STM_CHIP.41
SIM_RESET: SIM900-R11.1
SIM_RX: IC1.P$10 STM_CHIP.51
SIM_STATUS: IC1.P$66 SIM900-R5.2
SIM_TX: IC1.P$9 STM_CHIP.50
SR_DS: IC2.14 STM_CHIP.8
SR_RST: IC2.10 IC3.10 IC5.10 STM_CHIP.11
SR_SHCP: IC2.11 IC3.11 IC5.11 STM_CHIP.10
SR_STCP: IC2.12 IC3.12 IC5.12 STM_CHIP.9
SWD_NRST: S1.1 S1.2 STM-C8.1 STM_CHIP.7
SWD_TCK: STM-SWD.2 STM_CHIP.49
SWD_TMS: STM-SWD.4 STM_CHIP.46
T: RT3.1 U$12.PIN$3
T_CLK: STM_CHIP.27 U$13.T_CLK
T_DIN: STM_CHIP.29 U$13.T_DIN
T_DO: STM_CHIP.30 U$13.T_DO
T_IRQ: STM_CHIP.28 U$13.T_IRQ
TXN: ETH-R2.1 ETHERNET.2 U2.1
TXP: ETH-R1.1 ETHERNET.1 U2.2
USB_DM: STM_CHIP.44 USB_IN.D-1
USB_DP: STM_CHIP.45 USB_IN.D+1
USIM_CLK: SIM900-R2.2 U$8.SIM_CLK
USIM_DATA: SIM900-R3.2 U$8.SIM_IO
USIM_RESET: SIM900-R1.2 U$8.SIM_RST
USIM_VCC: IC1.P$30 SIM900-C4.1 SIM900-C5.1 SIM_C1.2 SIM_C2.2 U$8.SIM_VDD
VBAT: BAT1.PWR@1 STM_CHIP.1
VCC: ETH-R1.2 ETH-R2.2 ETH-R3.2 STM-C9.1 STM-L1.2 STM_CHIP.13 SYS-C4.1 SYS-R2.2 U2.4 U2.8 U2.11 U2.15 U2.17 U2.21 W5500-C6.1 W5500-C7.1 W5500-C8.1 W5500-C9.1 W5500-C10.1 W5500-C11.1 W5500-C12.+
VDD: CC_C8.1 CC_C14.1 CC_C20.1 DHT-R1.1 ESP_EXT.1 ETHERNET.9 ETHERNET.12 IC2.16 IC3.16 IC5.16 LCD-R1.2 PWR-SWT.1 R_VREG.2 RW5500-1.2 RW5500-1.3 RW5500-1.4 RW5500-3.1 SENSOR-DHT.1 SIM900-R4.2 SIM900-R7.2 STM-C1.2 STM-C10.1 STM-C11.1 STM-C12.1 STM-C13.1 STM-L1.1 STM-SWD.1 STM-USART.1 STM_CHIP.19 STM_CHIP.32 STM_CHIP.48 STM_CHIP.64 SYS-C3.1 SYS-L2.2 SYS-R2.1 U2.28 U$4.8 U$4.11 U$4.14 U$4.16 U$4.20 U$4.22 U$4.24 U$13.LCD_VCC W5500-C5.1 W5500-C13.+ W5500-R13.2
VESP: ESP-C1.1 ESP-GPIO0.1 ESP_EXT.2 U$5.CH_PD U$5.GPIO02 U$5.REST U$5.VCC